# Altium PCB FAT42.PCBDOC
Units mm, origin at the board's own origin, x right, y up, seen from the top; angles counter-clockwise.
Board outline 152.4 x 101.6 mm, 4 copper layers (Top Layer, MidLayer1, MidLayer2, Bottom Layer); 76 components, 152 nets, 250 pads, 76 vias.
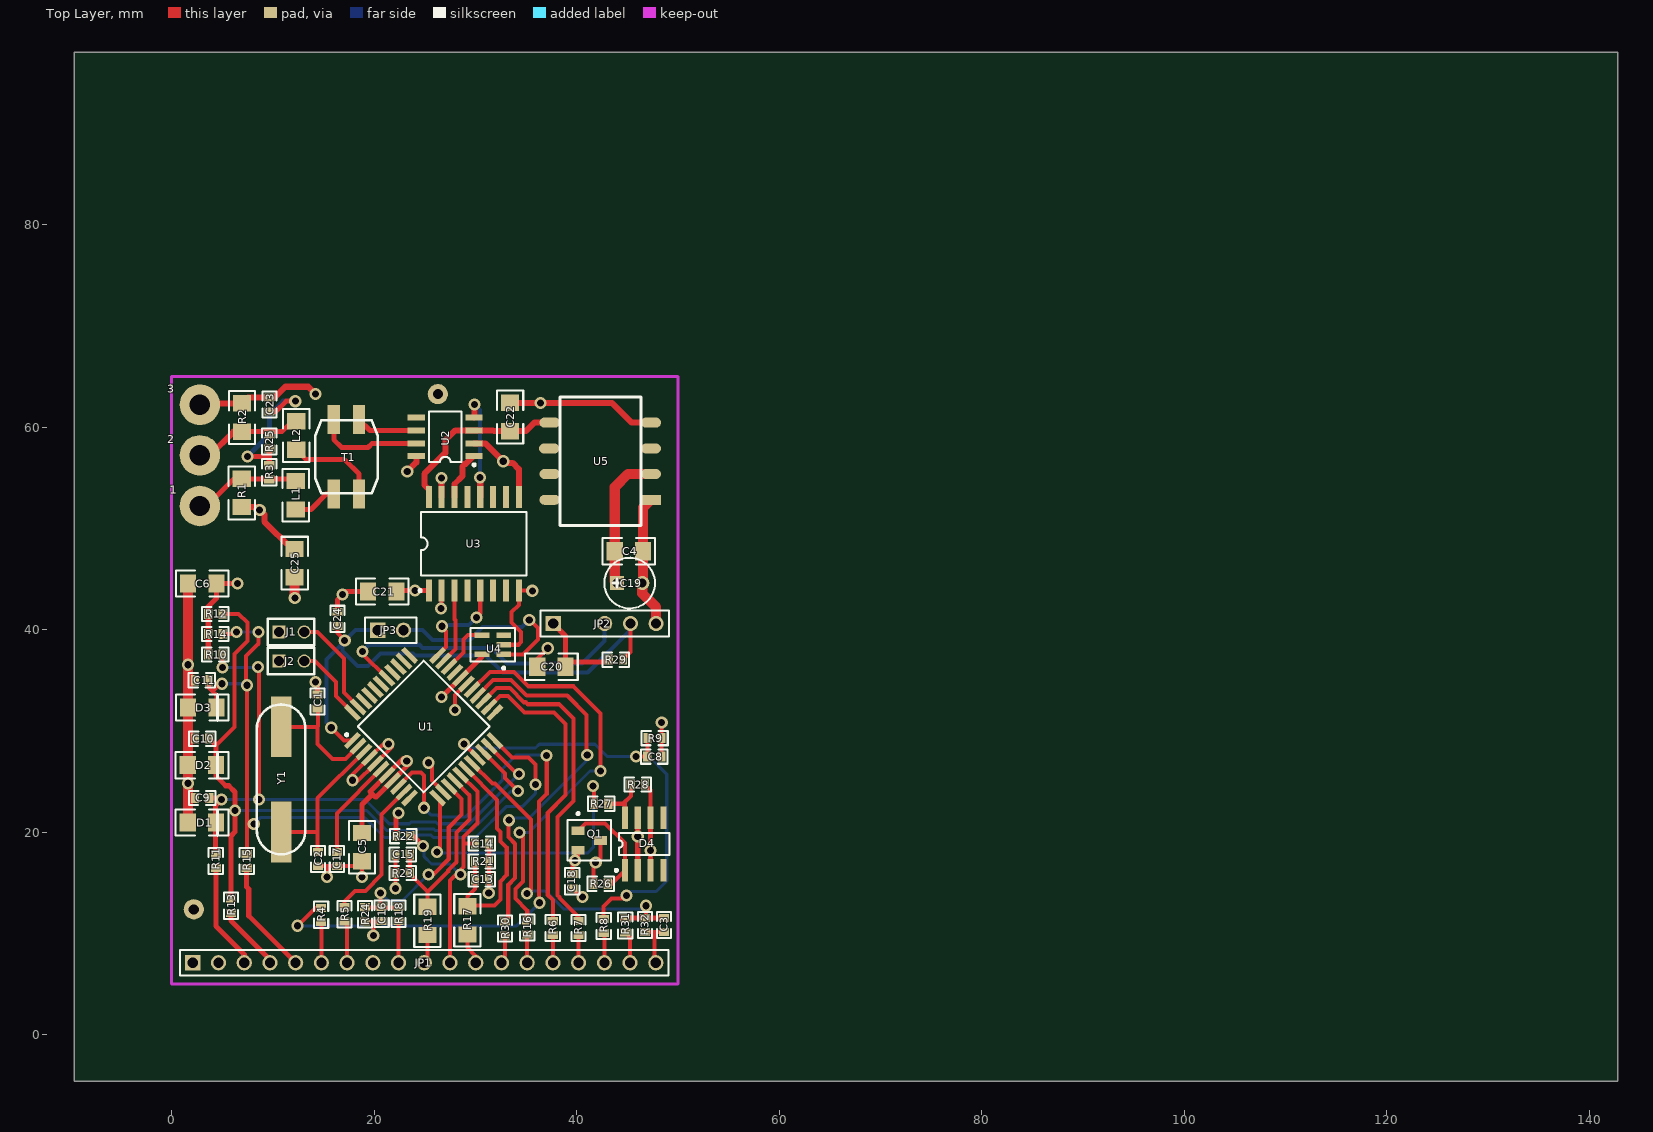
[diagram p0: Top Layer view]
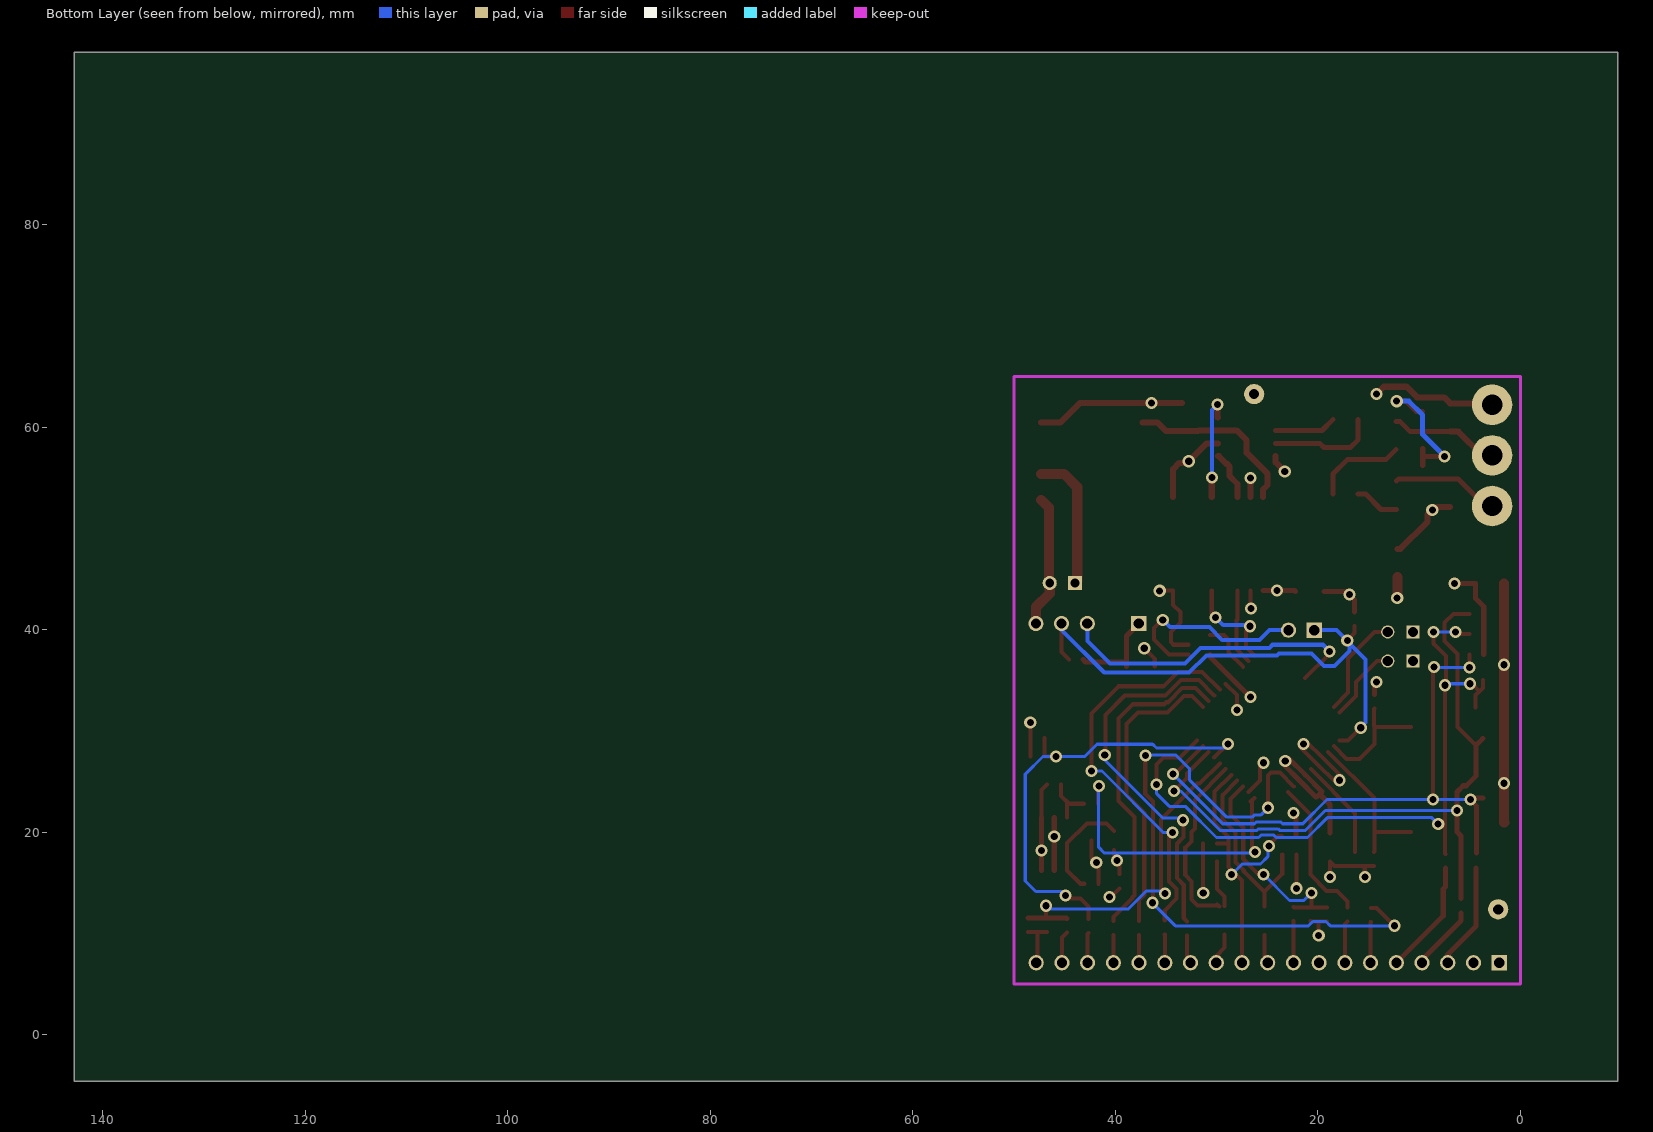
[diagram p1: Bottom Layer view, seen from below]
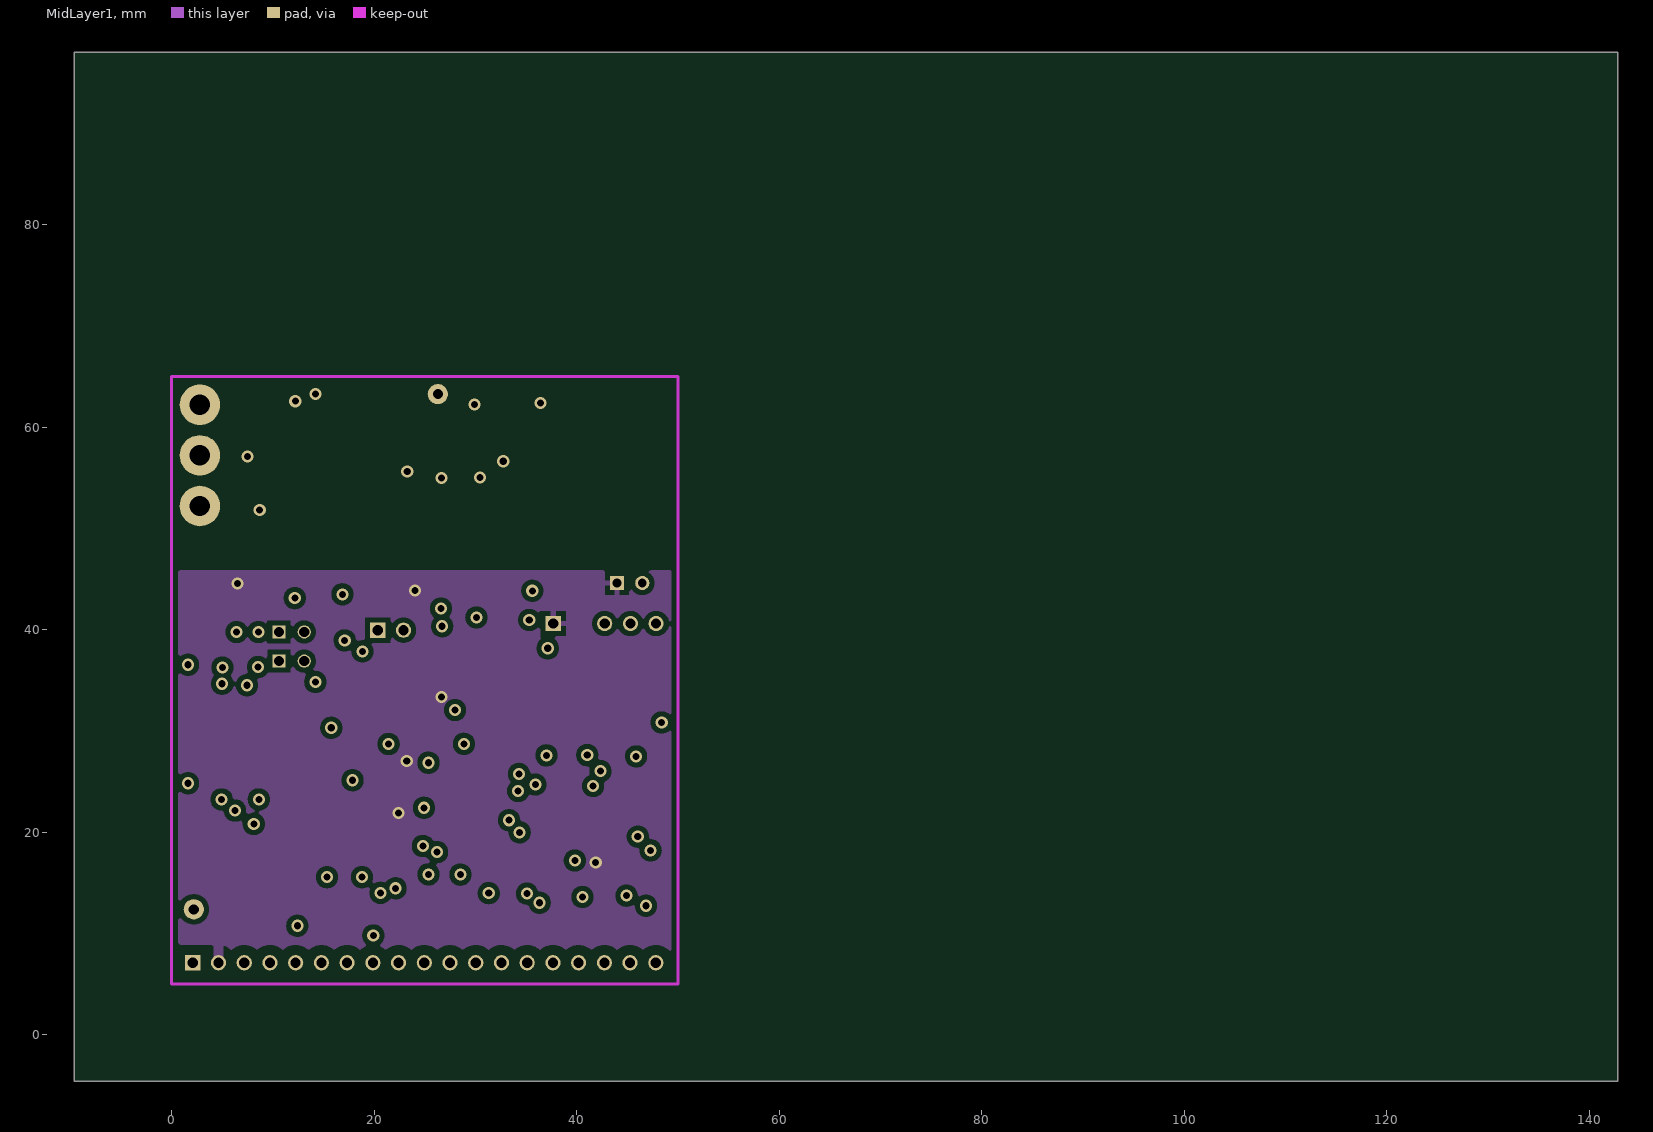
[diagram p2: MidLayer1]
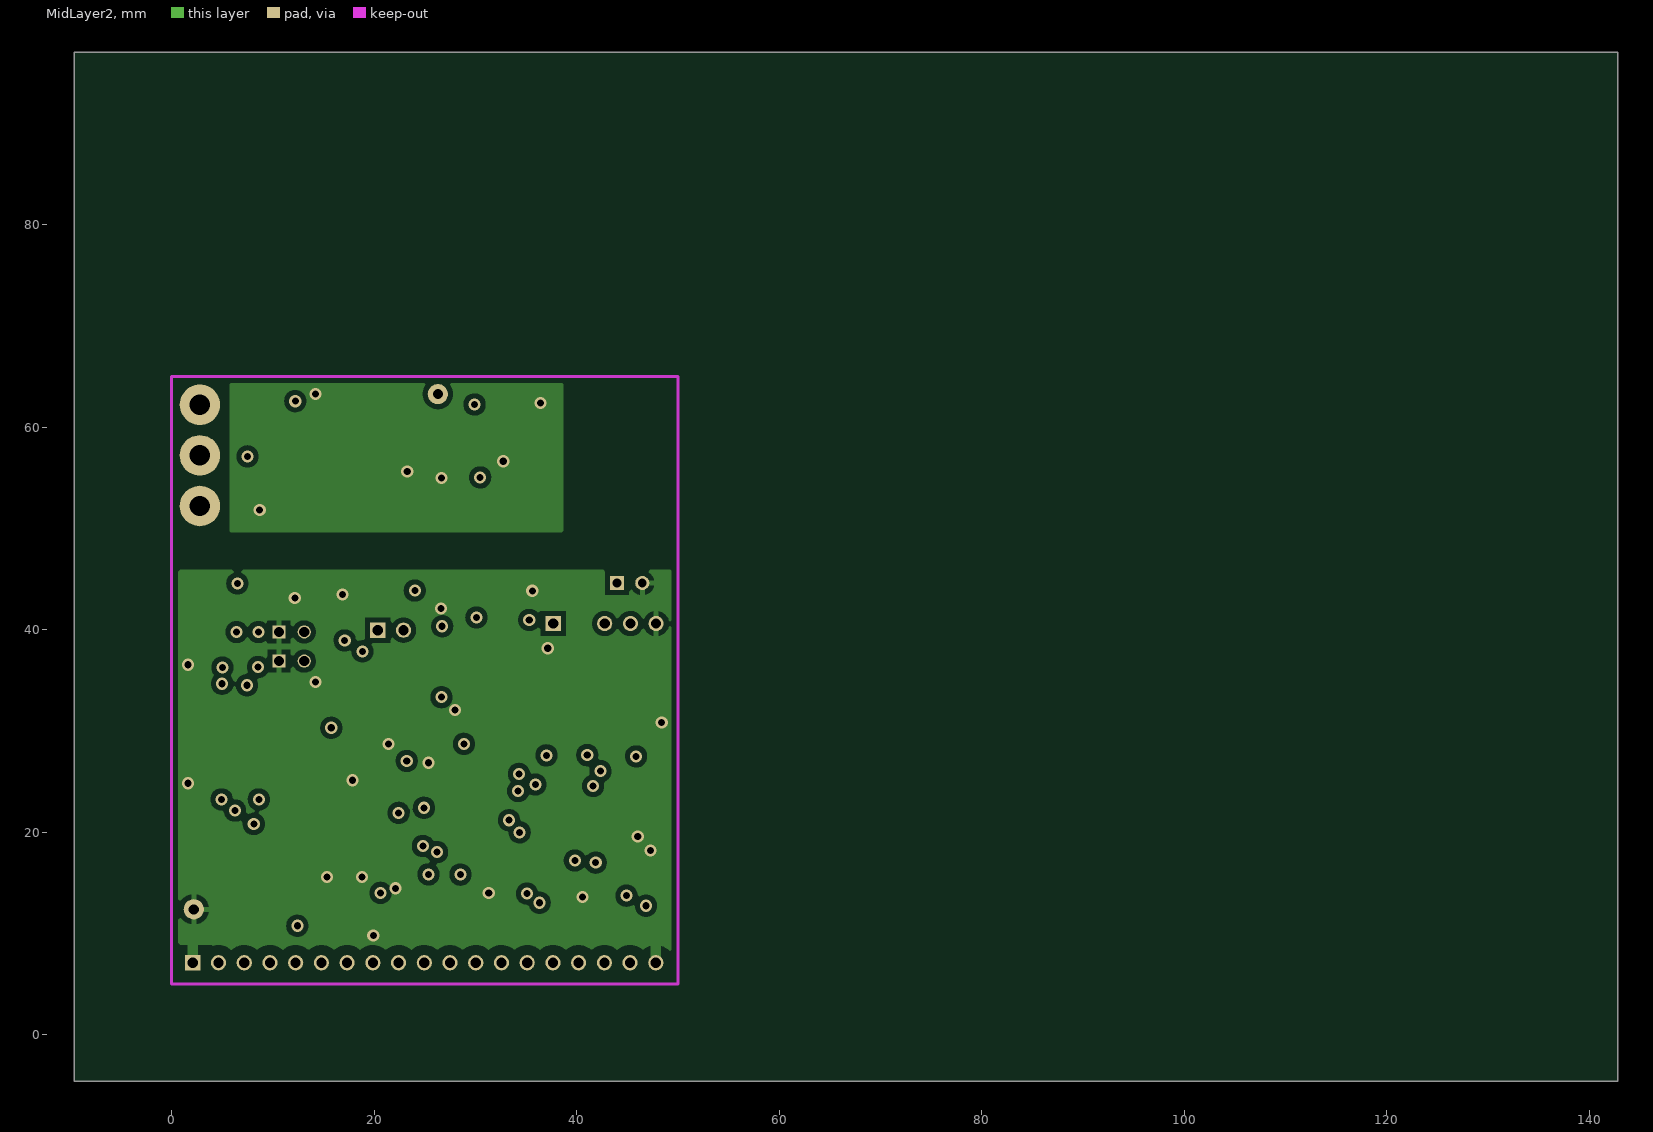
[diagram p3: MidLayer2]

## Layer stack, top to bottom
Top Layer: signal copper 0.0356
Dielectric: core 0.32, FR-4, Dk 4.8
MidLayer1: signal copper 0.0356
Dielectric: prepreg 0.32, FR-4, Dk 4.8
MidLayer2: signal copper 0.0356
Dielectric: core 0.32, FR-4, Dk 4.8
Bottom Layer: signal copper 0.0356

## Board outline
-9.6,-4.6 142.8,-4.6 142.8,97 -9.6,97

## Design rules (kind name [scope] priority, off if disabled: settings)
Clearance Clearance_1 [InPoly vs InComponent(JP1)] p1: gap=1
Clearance POLY [InPoly] p2: gap=0.5
Clearance mega [InComponent(U1)] p3: gap=0.2
Clearance [All] p4: gap=0.254
ComponentClearance [All] p1: gap=0.01 collisioncheckmode=0
PolygonConnect PolygonConnect_1 [InComponent(JP1)] p1: connectstyle=Relief reliefconductorwidth=1 reliefentries=4 polygonreliefangle="90 Angle"
PolygonConnect [All] p2: connectstyle=Relief reliefconductorwidth=0.5 reliefentries=4 polygonreliefangle="90 Angle"
RoutingLayers [All] p1: top layer=Horizontal mid layer 1="Not Used" mid layer 2="Not Used" bottom layer=Vertical
RoutingVias [All] p1: holewidth=0.7 width=1.2 viastyle="Through Hole" minholewidth=0.6 minwidth=1.1 maxholewidth=0.85 maxwidth=1.5
SolderMaskExpansion [All] p1: expansion=0.102
TestPointUsage [All] p1: valid=0 allowmultiple=FALSE
Testpoint [All] p1: side=15 testpointundercomponent=TRUE minsize=1.016 maxsize=2.54 preferedsize=1.524 minholesize=0 maxholesize=1.016 preferedholesize=0.813 testpointgrid=0.025 style=1023 order=-539222988
Width [All] p1: maxlimit=2 minlimit=0.254 preferedwidth=0.254 toplayer_prefwidth=0.6 midlayer1_prefwidth=0.5 midlayer2_prefwidth=0.5 bottomlayer_prefwidth=0.3 minimp=50.000000 maximp=50.000000 favimp=50.000000
16 further rules are at their usual default settings.

## Components (designator, comment, footprint, x,y, rotation, side; value= is the part's Value field where it differs from the comment)
1 "" PIN2R#1 2.875,51.85 r0 top (schematic designator ?)
2 "" PIN2R#2 2.875,57.05 r0 top (schematic designator ?)
3 "" PIN2R#3 2.7,61.925 r0 top (schematic designator ?)
C1 "10pF" _0603 14.425,32.9 r270 top (schematic designator C?)
C2 "10pF" _0603 14.475,17.35 r90 top (schematic designator C?)
C3 "1.0" _0603 48.625,10.825 r90 top (schematic designator C?)
C4 "22.0" _1206 45.15,47.725 r180 top (schematic designator C?)
C5 "22.0" _1206 18.8,18.525 r90 top
C6 "1.0" _1206 3.05,44.55 r0 top
C8 "1.0" _0603 47.675,27.45 r180 top (schematic designator C?)
C9 "1.0" _0603 3.025,23.375 r0 top
C10 "1.0" _0603 3.025,29.225 r0 top
C11 "1.0" _0603 3,35 r0 top
C13 "1.0" _0603 30.65,15.35 r180 top
C14 "1.0" _0603 30.65,18.875 r180 top
C15 "1.0" _0603 22.825,17.8 r0 top
C16 "1.0" _0603 20.75,11.925 r90 top
C17 "1.0" _0603 16.325,17.35 r90 top
C18 "1.0" _0603 39.575,15.15 r90 top
C19 "22.0x50" el3 43.975,44.6 r0 top
C20 "22.0" _1206 37.5,36.325 r180 top
C21 "22.0" _1206 20.8,43.75 r180 top
C22 "22.0" _1206 33.425,61 r90 top
C23 "100n" _0603 9.675,62.225 r90 top
C24 "1.0" _0603 16.375,41.05 r270 top
C25 "1n0 x 1000" _1206 12.15,46.575 r90 top (schematic designator C?)
D1 "C5v6" _1206d 3,20.935 r180 top
D2 "C5v6" _1206d 3,26.605 r180 top
D3 "C5v6" _1206d 3.025,32.3 r180 top
D4 "TL431ACD" SO-G8 46.675,18.825 r0 top
J1 "" jmp 10.6,39.775 r0 top
J2 "" jmp 10.6,36.9 r0 top
JP1 "PLSR19" HDR1X19 2.1,7.1 r0 top
JP2 "" HDR1X5_uart 37.7,40.6 r0 top
JP3 "PLS2" HDR1X2 20.375,39.925 r0 top
L1 "Inductor Iron" _1206 12.25,53.275 r90 top (schematic designator L?)
L2 "Inductor Iron" _1206 12.3,59.175 r90 top (schematic designator L?)
Q1 "BC847" SO-G3 41.25,19.175 r270 top
R1 "ST1206K14G" _1206 6.95,53.475 r270 top
R2 "ST1206K14G" _1206 6.95,60.95 r90 top
R3 "680R" _0603 9.65,55.525 r90 top
R4 "1K0" _0603 14.775,11.825 r90 top (schematic designator R31)
R5 "1K0" _0603 17.075,11.875 r90 top (schematic designator R30)
R6 "100R" _0603 37.65,10.525 r270 top (schematic designator R?)
R7 "100R" _0603 40.175,10.525 r270 top (schematic designator R?)
R8 "1R0" _0603 42.675,10.725 r270 top (schematic designator R?)
R9 "2K0" _0603 47.7,29.275 r180 top (schematic designator R?)
R10 "1K0" _0603 4.325,37.525 r0 top
R11 "100R" _0603 4.375,17.15 r270 top
R12 "1K0" _0603 4.325,41.55 r0 top
R13 "100R" _0603 5.875,12.725 r270 top
R14 "1K0" _0603 4.325,39.575 r0 top
R15 "100R" _0603 7.425,17.15 r270 top
R16 "100R" _0603 35.125,10.575 r270 top
R17 "33K" _1206 29.225,11.275 r270 top
R18 "100R" _0603 22.425,11.925 r270 top
R19 "33K" _1206 25.275,11.225 r270 top
R21 "1K5" _0603 30.65,17.1 r180 top
R22 "2K0" _0603 22.875,19.6 r180 top
R23 "1K5" _0603 22.825,15.95 r0 top
R24 "100M" _0603 19.1,11.875 r90 top
R25 "680R" _0603 9.65,58.575 r270 top
R26 "1K0" _0603 42.375,14.9 r0 top
R27 "1K0" _0603 42.425,22.8 r180 top
R28 "1K8" _0603 46.05,24.7 r180 top
R29 "10K" _0603 43.875,37.025 r0 top
R30 "100R" _0603 32.925,10.475 r270 top
R31 "33K" _0603 44.8,10.775 r270 top
R32 "2K0" _0603 46.75,10.825 r90 top
T1 "Trans Cupl" B82790 17.275,57.05 r90 top
U1 "STM8S208S6" QFP10X10-G44/G10N 24.9,30.425 r45 top
U2 "TJA1050" SO-G8/D5 27.025,59.025 r90 top
U3 "ISO7231" SO-G16/D10.4 29.85,48.475 r0 top
U4 "TPS3823-50" SO-G5/P.95 31.725,38.5 r90 top
U5 "SBT01L-05" SBT01L 47.35,52.8 r90 top
Y1 "10MHz" hc49/us 10.825,25.2 r270 top

## Footprints (in the part's own frame and the unit in brackets; to place one, negate y for a bottom-side part, rotate by r counter-clockwise, add the part's x,y. Pads: shape width x height; smd on the part's side, far side on the other; paste and mask are expansions set on the pad)
_0603 [mm]
  rect 0.8x1 smd: 1(-0.7,0) 2(0.7,0)
  silkscreen extent -1.3,-0.7 1.3,0.7
_1206 [mm]
  rect 1.6x1.8 smd: 1(-1.412,-0.007) 2(1.388,-0.007)
  silkscreen extent -2.61,-1.31 2.59,1.29
_1206d [mm]
  rect 1.6x1.8 smd: 1(1.395,-0.009) 2(-1.405,-0.009)
  silkscreen extent -2.6,-1.31 2.6,1.29
B82790 [mm]
  rect 2.85x1.2 smd: 1(3.675,-1.25) 2(-3.675,-1.25) 3(3.675,1.25) 4(-3.675,1.25)
  silkscreen extent -3.6,-3.1 3.6,3.1
el3 [mm]
  rect 1.4x1.4 hole 0.85: 1(0.011,-0.008)
  round 1.4 hole 0.85: 2(2.511,-0.008)
  silkscreen extent -1.23,-2.51 3.76,2.49
hc49/us [mm]
  rect 6x2 smd: 1(-5.2,0) 2(5.2,0)
  silkscreen extent -7.4,-2.4 7.4,2.4
HDR1X2 [mm]
  rect 1.5x1.5 hole 1: 1(-0.005,0.012)
  round 1.5 hole 1: 2(2.535,0.012)
  silkscreen extent -1.28,-1.26 3.8,1.28
HDR1X5_uart [mm]
  rect 1.5x1.5 hole 1: 1(-0.008,-0.009)
  round 1.5 hole 1: 3(5.072,-0.009) 4(7.612,-0.009) 5(10.152,-0.009)
  silkscreen extent -1.28,-1.28 11.42,1.26
HDR1X19 [mm]
  rect 1.5x1.5 hole 1: 1(0,0)
  round 1.5 hole 1: 2(2.54,0) 3(5.08,0) 4(7.62,0) 5(10.16,0) 6(12.7,0) 7(15.24,0) 8(17.78,0) 9(20.32,0) 10(22.86,0) 11(25.4,0) 12(27.94,0) 13(30.48,0) 14(33.02,0) 15(35.56,0) 16(38.1,0) 17(40.64,0) 18(43.18,0) 19(45.72,0)
  silkscreen extent -1.27,-1.27 46.99,1.27
jmp [mm]
  rect 1.3x1.3 hole 1: 1(0.008,-0.012)
  round 1.3 hole 1: 2(2.508,-0.012)
  silkscreen extent -1.09,-1.31 3.51,1.29
PIN2R#1 [mm]
  round 4 hole 2: 1(-0.075,0.35)
PIN2R#2 [mm]
  round 4 hole 2: 1(-0.075,0.15)
PIN2R#3 [mm]
  round 4 hole 2: 1(0.1,0.275)
QFP10X10-G44/G10N [mm]
  rect 1.9x0.5 smd: 1(-5.95,4) 2(-5.95,3.2) 3(-5.95,2.4) 4(-5.95,1.6) 5(-5.95,0.8) 6(-5.95,0) 7(-5.95,-0.8) 8(-5.95,-1.6) 9(-5.95,-2.4) 10(-5.95,-3.2) 11(-5.95,-4) 23(5.95,-4) 24(5.95,-3.2) 25(5.95,-2.4) 26(5.95,-1.6) 27(5.95,-0.8) 28(5.95,0) 29(5.95,0.8) 30(5.95,1.6) 31(5.95,2.4) 32(5.95,3.2) 33(5.95,4)
  rect 0.5x1.9 smd: 12(-4,-5.95) 13(-3.2,-5.95) 14(-2.4,-5.95) 15(-1.6,-5.95) 16(-0.8,-5.95) 17(0,-5.95) 18(0.8,-5.95) 19(1.6,-5.95) 20(2.4,-5.95) 21(3.2,-5.95) 22(4,-5.95) 34(4,5.95) 35(3.2,5.95) 36(2.4,5.95) 37(1.6,5.95) 38(0.8,5.95) 39(0,5.95) 40(-0.8,5.95) 41(-1.6,5.95) 42(-2.4,5.95) 43(-3.2,5.95) 44(-4,5.95)
  silkscreen extent -6.07,-4.6 4.6,4.92
SBT01L [mm]
  rect 1x2 smd: 1(0.007,0.007)
  oval 1x2 smd: 2(2.557,0.007) 3(5.082,0.007) 4(7.632,0.007) 5(7.632,10.007) 6(5.082,10.057) 7(2.557,10.007) 8(0.007,10.007)
  silkscreen extent -2.54,0.98 10.16,9.01
SO-G3 [mm]
  rect 0.85x1.3 smd: 1(-0.948,-1.102) 2(0.952,-1.102) 3(0.002,1.098)
  silkscreen extent -2.77,-2.15 2,2.15
SO-G5/P.95 [mm]
  rect 0.55x1.45 smd: 1(-0.95,-1.075) 2(0,-1.075) 3(0.95,-1.075) 4(0.95,1.075) 5(-0.95,1.075)
  silkscreen extent -2.42,-2.2 1.65,2.2
SO-G8 [mm]
  rect 0.6x2.2 smd: 1(-1.905,-2.6) 2(-0.635,-2.6) 3(0.635,-2.6) 4(1.905,-2.6) 5(1.905,2.6) 6(0.635,2.6) 7(-0.635,2.6) 8(-1.905,2.6)
  silkscreen extent -2.88,-2.72 2.5,1.1
SO-G8/D5 [mm]
  rect 0.6x1.7 smd: 1(-1.905,-2.85) 2(-0.635,-2.85) 3(0.635,-2.85) 4(1.905,-2.85) 5(1.905,2.85) 6(0.635,2.85) 7(-0.635,2.85) 8(-1.905,2.85)
  silkscreen extent -2.88,-2.97 2.5,1.6
SO-G16/D10.4 [mm]
  rect 0.6x2.15 smd: 1(-4.445,-4.625) 2(-3.175,-4.625) 3(-1.905,-4.625) 4(-0.635,-4.625) 5(0.635,-4.625) 6(1.905,-4.625) 7(3.175,-4.625) 8(4.445,-4.625) 9(4.445,4.625) 10(3.175,4.625) 11(1.905,4.625) 12(0.635,4.625) 13(-0.635,4.625) 14(-1.905,4.625) 15(-3.175,4.625) 16(-4.445,4.625)
  silkscreen extent -5.42,-4.75 5.2,3.15

## Part data
1 2 3: library part Socket_Ring, "Socket"
C1 C2 C3 C4 C5 C6 C8 C9 C10 C11 C13 C14 C15 C16 C17 C18 C20 C21 C22 C23 C24 C25: library part "Cap Semi", "Capacitor (Semiconductor SIM Model)"
C19: library part "Cap Pol1", "Polarized Capacitor (Radial)"
D1 D2 D3: library part Zener, "Default Diode"
D4: "Programmable Precision Reference"
J1 J2: library part JMP, "Switch"
JP1: library part "Header 30", "Header, 30-Pin"
JP2: library part SWIM_CONN
JP3: library part "Header 2", "Header, 2-Pin"
L1 L2: "Magnetic-Core Inductor"
Q1: library part BC847ALT1, "General Purpose Transistor NPN Silicon"
R1 R2: library part "Res Varistor", "Varistor (Voltage-Sensitive Resistor)"
R3 R4 R5 R6 R7 R8 R9 R10 R11 R12 R13 R14 R15 R16 R17 R18 R19 R21 R22 R23 R24 R25 R26 R27 R28 R29 R30 R31 R32: library part Res2, "Resistor"
T1: "Transformer (Coupled Inductor Model)"
U4: library part TPS3823, "Reset IC"
U5: library part SBT01L
Y1: library part XTAL, "Crystal Oscillator"

## Free pads (board coordinates)
  round 2 hole 1: 0(2.2,12.375) 0(26.3,63.25)

## Via types
v1: diameter 1.2, hole 0.7, Top Layer to Bottom Layer, 76 vias

## Nets (pads, with @x,y where several pads share a name; then routed paths per layer and width w, separated by ;. In a path a pad name is that pad's centre, name@x,y a point inside that pad or via, vN(x,y) a via of type N, cw(c..) or ccw(c..) an arc to the next point about the centre after c; other vN are vias at no path point)
+5V: C4.2 C5.2 C6.2 C19.1 C20.1 C21.1 JP1.2 JP2.1 Q1.3 R10.1 R12.1 R14.1 R22.2 R26.1 R29.1 U1.7 U1.8 U1.29 U3.1 U4.5 U5.2 | length 63.2
  Top Layer w0.4: R26.1 41.675,16.775 42.348,17.448 Q1.3
  Top Layer w0.5: R10.1 3.625,42.275 4.438,43.088 C6.2 4.444,44.55 v1@6.525,44.55 ; C5.2 18.807,22.716 19.845,23.755 ; R22.2 22.175,21.625 v1@22.225,21.675 ; C21.1 22.212,43.762 22.3,43.85 U3.1 ; v1@23.15,26.95 v1(23.225,27.025) ; v1(26.65,33.325) 26.669,33.325 30.65,37.306 U4.5 ; JP2.1 38.912,39.37 C20.1 ; C20.1@38.912,36.8 42.95,36.8 R29.1 ; 19.6,23.994 U1.7 22.85,27.244 23.406,26.687 23.425,26.687 U1.8 20.213,23.475 20.125,23.475 19.606,23.994 19.6,23.994
  Top Layer w1: C19.1 43.762,44.816 43.762,54.062 45.057,55.357 U5.2
  other v1: 41.884,16.984 22.425,21.9 24.025,43.85 6.5,44.55
C0: 
C1: 
C2: 
C3: 
C4: 
C5: 
C7: 
C8: 
CS: 
D2: 
D3: 
D4: 
D4: 
D4: 
D5: 
D6: 
D7: 
GND: C1.1 C2.1 C3.1 C4.1 C5.1 C6.1 C8.1 C9.1 C10.1 C11.1 C13.1 C14.1 C15.1 C16.1 C17.1 C18.1 C19.2 C20.2 C21.2 C24.1 C25.1 D1.1 D2.1 D3.1 D4.2 D4.3 D4.6 D4.7 J1.1 J2.1 JP1.1 JP1.19 JP2.5 pad.0@2.2,12.375 R9.1 R21.1 R23.1 R24.1 R28.1 R32.1 U1.4 U1.5 U1.13 U1.28 U3.2 U3.8 U4.2 U5.1 | length 118.1
  Top Layer w0.4: C2.1 18.344,16.65 C5.1 18.807,15.557 v1(18.8,15.55) ; v1(15.35,15.55) 15.375,15.575 15.375,16.65 ; R24.1 20.7,11.175 C16.1 ; v1(19.925,9.8) 19.925,11.175 ; v1@21.55,28.588 v1@21.562,28.588 ; v1(22.125,14.45) C15.1 ; v1(25.375,26.85) 25.7,26.525 25.7,25.1 U1.13 ; v1(26.6,42.075) 26.675,42.15 U3.2 ; v1(28,32.05) 28,33.525 U1.28 ; C14.1 31.35,14.475 v1@31.675,14.15 ; U4.2 34.25,38.5 34.525,38.775 34.525,39.75 33.575,40.7 33.575,41.725 34.295,42.445 U3.8 35.575,43.85 35.6,43.825 v1(35.625,43.825) ; C20.2 36.112,37.112 v1(37.15,38.15) ; C18.1 40.625,13.4 v1@40.675,13.4 ; R32.1 C3.1 ; R28.1 47.31,24.14 D4.6 ; 47.7,10.125 47.7,7.22 JP1.19 ; C8.1 48.375,29.25 R9.1 v1(48.4,30.825) ; v1@17.687,25.313 18.125,24.875 18.219,24.875 U1.5 20.133,26.783 21.75,28.4 21.738,28.4 v1(21.44,28.698) 21.44,28.71 21.2,28.95 21.162,28.95 U1.4 17.687,25.475 v1@17.687,25.313
  Top Layer w0.5: v1(14.2,34.825) 14.425,34.6 C1.1 ; C24.1 16.375,42.925 17.207,43.757 C21.2 ; D4.2 D4.7 ; D4.3 D4.6
  Top Layer w1: D1.1 1.638,20.977 C6.1 ; C25.1 12.157,43.118 v1(12.175,43.1) ; U5.1 46.562,52.027 C4.1 46.562,44.668 C19.2 46.486,43.564 47.852,42.198 JP2.5
  MidLayer1 w0.5: v1(35.625,43.825) v1@35.65,43.8 ; v1@40.65,13.4 v1@40.675,13.4
  other v1: 40.575,13.6 31.325,13.975 47.31,18.2 46.04,19.55 1.638,24.825 17.879,25.121 1.638,36.525 16.875,43.475
ID0: 
ID0: JP1.3 R11.2 | length 10.5
  Top Layer w0.5: R11.2 4.375,10.725 7.18,7.92 JP1.3
ID1: JP1.4 R13.2 | length 6.5
  Top Layer w0.5: R13.2 5.875,11.25 9.72,7.405 JP1.4
ID2: JP1.5 R15.2 | length 11.4
  Top Layer w0.5: R15.2 7.425,14.575 7.625,14.375 7.625,11.735 JP1.5
IN0: JP1.17 R8.2 | length 3
  Top Layer w0.4: R8.2 42.74,9.96 JP1.17
IN1: 
IN1: 
IN1: 
IN1: 
IN2: JP1.12 R17.2 | length 3.1
  Top Layer w0.4: R17.2 29.218,8.607 30.04,7.785 JP1.12
IN3: C14.2 JP1.11 R22.1 U1.16 | length 28.9
  Top Layer w0.4: R22.1 23.95,19.6 v1@24.95,18.6 ; JP1.11 27.5,15.2 28.85,16.55 28.85,19.525 30.2,20.875 30.2,23.994 U1.16 ; v1@28.3,16 28.5,15.8 v1(28.525,15.8) ; 28.85,18.75 28.975,18.875 C14.2
  Bottom Layer w0.3: v1@24.95,18.6 24.95,17.575 25.675,16.85 27.475,16.85 v1(28.525,15.8)
  other v1: 24.825,18.625
IN4: JP1.10 R19.2 | length 2.9
  Top Layer w0.4: JP1.10 25.268,7.408 R19.2
IN5: JP1.9 R18.2 | length 4.1
  Top Layer w0.4: JP1.9 22.42,11.22 R18.2
IN6: JP1.18 R31.2 | length 3.2
  Top Layer w0.4: R31.2 45.28,9.595 JP1.18
LED0: JP1.6 R4.1 | length 4
  Top Layer w0.4: R4.1 14.8,11.1 JP1.6
LED1: JP1.7 R5.1 | length 4.2
  Top Layer w0.4: R5.1 17.34,10.91 JP1.7
MISO: 
MOSI: 
Net1_1: 1.1 L1.2 R1.1 R3.1 | length 10.7
  Top Layer w0.5: 1.1 3.475,52.2 6.162,54.887 R1.1 12.032,54.887 L1.2
Net2_1: 2.1 L2.2 R2.1 R25.1 | length 11.3
  Top Layer w0.5: R2.1@6.588,59.538 10.888,59.538 11.913,60.563 L2.2
  Top Layer w0.6: 2.1 3.8,57.2 6.138,59.538 R2.1
Net3_1: 3.1 C22.2 C23.2 C25.2 R1.2 R2.2 U2.2 U2.8 U3.9 U3.15 U5.4 | length 46.5
  Top Layer w0.6: 3.1 2.938,62.338 R2.2 7.544,62.925 C23.2 10.2,62.925 11.25,63.975 13.5,63.975 v1(14.225,63.25) ; R1.2 8.438,52.087 9.175,51.35 9.175,50.65 11.862,47.963 C25.2 ; v1(23.275,55.6) 24.175,56.5 U2.8 ; U3.15 v1(26.675,54.975) ; U2.2 30.985,58.39 32.925,56.45 33.675,56.45 34.295,55.83 U3.9 ; C22.2 43.487,62.388 45.443,60.432 U5.4
  other v1: 8.705,51.82 32.758,56.617 36.45,62.388
NetC1_2: 
NetC2_2: 
NetC17_2: C17.2 U1.6 | length 10
  Top Layer w0.4: C17.2 16.325,21.85 U1.6
NetC21_2: 
NetC22_1: C22.1 U2.3 U3.16 U5.5 | length 17.7
  Top Layer w0.6: U3.16 25.405,53.845 24.975,54.275 24.975,55.375 27.05,57.45 27.05,58.675 28.035,59.66 31.753,59.66 31.825,59.588 34.988,59.588 35.832,60.432 U5.5
NetC23_1: C23.1 R3.2 R25.2 | length 14.9
  Top Layer w0.5: v1(7.5,57.1) 9.65,57.1 ; R3.2 R25.2 ; C23.1 10.3,61.525 11.325,62.55 v1(12.225,62.55)
  Bottom Layer w0.5: v1(7.5,57.1) 9.675,59.275 9.675,61.2 11.025,62.55 v1(12.225,62.55)
NetC25_2: 
NetC26_2: 
NetD1_2: 
NetD2_1: 
NetD2_2: 
NetD3_2: 
NetD4_1: D4.1 Q1.1 R26.2 | length 10.7
  Top Layer w0.4: Q1.1 40.874,20.85 42.825,20.85 44.77,18.905 D4.1 43.445,14.9 R26.2
NetD4_8: D4.8 R27.1 R28.2 | length 5.2
  Top Layer w0.4: R27.1 44.6,22.8 45.35,23.55 R28.2 ; D4.8 44.77,22.97
NetD14_2: 
NetJ1_2: J1.2 U1.43 | length 10.4
  Top Layer w0.4: J1.2 14.412,39.763 17.025,37.15 17.025,33.775 U1.43
NetJ2_2: J2.2 U1.44 | length 7.7
  Top Layer w0.4: J2.2 14.162,36.888 16.225,34.825 16.225,33.443 U1.44
NetJmp1_2: 
NetJmp2_2: 
NetJP1_5: 
NetJP1_6: 
NetJP1_7: 
NetJP1_8: 
NetJP1_13: 
NetJP1_13: 
NetJP1_13: 
NetJP1_13: JP1.13 R30.2 | length 2.8
  Top Layer w0.4: JP1.13 32.925,7.445 R30.2
NetJP1_14: JP1.14 R16.2 | length 2.8
  Top Layer w0.4: JP1.14 35.12,9.87 R16.2
NetJP1_15: 
NetJP1_15: 
NetJP1_15: JP1.15 R6.2 | length 2.7
  Top Layer w0.4: R6.2 37.65,7.11 JP1.15
NetJP1_16: 
NetJP1_16: 
NetJP1_16: JP1.16 R7.2 | length 2.7
  Top Layer w0.4: R7.2 40.2,9.8 JP1.16
NetJP1_17: 
NetJP1_17: 
NetJP1_25: 
NetJP1_27: 
NetJP1_28: 
NetJP3_2: JP3.2 U4.1 | length 19.9
  Top Layer w0.4: U4.1 34.7,37.55 36.175,39.025 36.175,40.175 35.4,40.95 v1(35.325,40.95)
  Bottom Layer w0.4: JP3.2 24.788,39.937 25.75,38.975 29.45,38.975 30.725,40.25 34.625,40.25 v1(35.325,40.95)
NetL1_1: L1.1 T1.4 | length 4.4
  Top Layer w0.5: L1.1 13.763,51.863 15.275,53.375 T1.4
NetL2_1: L2.1 T1.2 | length 9.2
  Top Layer w0.5: L2.1 13.294,56.775 17.1,56.775 18.525,55.35 T1.2
NetQ1_1: 
NetQ2_1: 
NetQ2_3: 
NetR14_1: 
NetR15_1: 
NetR24_1: 
NetR30_2: 
NetR31_2: 
NetR34_1: 
NetR35_1: 
NetR36_1: 
NetR41_2: 
NetT1_1: T1.1 U2.6 | length 6.1
  Top Layer w0.5: T1.1 19.59,59.66 U2.6
NetT1_3: T1.3 U2.7 | length 10.6
  Top Layer w0.5: T1.3 16.025,58.75 16.8,57.975 19.4,57.975 19.815,58.39 U2.7
NetU1_11: 
NetU1_30: 
NetU2_1: U2.1 U3.14 | length 4.9
  Top Layer w0.6: U3.14 27.945,54.37 28.725,55.15 28.725,56.1 29.025,56.4 ; 29.05,56.375 29.795,57.12 U2.1
NetU2_4: U2.4 U3.12 | length 10.7
  Top Layer w0.6: U2.4 29.925,60.98 v1(29.925,62.225) ; v1(30.475,55.025) 30.485,55.015 U3.12
  Bottom Layer w0.4: v1(29.925,62.225) 30.475,61.675 v1(30.475,55.025)
NetU3_4: 
NetU3_6: 
NetU3_7: 
PA1: C1.2 U1.2 Y1.1 | length 12.3
  Top Layer w0.4: Y1.1 14.4,30.4 ; C1.2 14.45,32.175 14.45,30.45 14.4,30.4 ; U1.2 17.175,27.225 15.875,27.225 14.4,28.7 14.4,30.4
PA2: C2.2 U1.3 Y1.2 | length 15.4
  Top Layer w0.4: Y1.2 14.4,20 14.425,20.025 ; C2.2 14.425,18.1 14.425,23.344 U1.3
PA4: R4.2 U1.9 | length 65.5
  Top Layer w0.4: v1(12.425,10.75) 14.2,12.525 R4.2 ; U1.9 23.744,25.875 24.65,25.875 24.925,25.6 v1(24.925,22.4) ; v1(36.35,13.025) 36.275,13.1 36.275,23 37.05,23.775 37.05,27.55 v1(37.025,27.575)
  Bottom Layer w0.3: v1(12.425,10.75) 18.775,10.75 19.2,11.175 20.5,11.175 20.925,10.75 34.075,10.75 v1(36.35,13.025) ; v1(24.925,22.4) 25.65,21.675 26.3,21.675 26.5,21.475 29,21.475 32.7,25.175 32.7,26.275 34.025,27.6 36.925,27.6 37.025,27.7 v1(37.025,27.575)
PA5: R5.2 U1.10 | length 14.4
  Top Layer w0.4: R5.2 17.075,13.15 18.125,14.2 19.15,14.2 20.75,15.8 20.75,21.749 U1.10
PB0: C9.2 D1.2 R10.2 R11.1 U1.21 | length 61.5
  Top Layer w0.4: v1(5.025,36.25) 5.025,36.55 R10.2 ; v1(8.55,36.3) 8.625,36.225 v1(8.625,23.225) ; U1.21 34.1,25.75 v1(34.3,25.75)
  Top Layer w0.5: C9.2 4.85,23.375 v1@5,23.225 ; R11.1@4.325,17.95 4.325,22.55 v1@5,23.225 ; v1(4.95,23.225) v1@5,23.225
  Bottom Layer w0.3: v1(4.95,23.225) 19.1,23.225 21.5,20.825 23.5,20.825 23.65,20.975 26.125,20.975 26.275,20.825 29.4,20.825 34.3,25.725 v1(34.3,25.75) ; v1(5.025,36.25) 8.5,36.25 v1(8.55,36.3)
PB1: C10.2 D2.2 R12.2 R13.1 U1.20 | length 69.2
  Top Layer w0.4: 4.405,28.545 6.225,30.366 6.225,37.575 6.871,38.221 7.5,38.85 7.5,40.675 6.625,41.55 R12.2 ; U1.20 32.925,25.794 32.925,25.35 v1(34.225,24.05)
  Top Layer w0.5: C10.2 4.405,28.545 4.405,25.52 5.35,24.575 5.65,24.575 6.275,23.95 6.275,20.025 5.875,19.625 R13.1
  Bottom Layer w0.3: v1(6.275,22.125) 19.275,22.125 21.225,20.175 23.775,20.175 23.925,20.325 25.875,20.325 26.025,20.175 29.675,20.175 33.55,24.05 v1(34.225,24.05)
PB2: C8.2 R8.1 R9.2 U1.19 | length 45.5
  Top Layer w0.4: v1(28.875,28.713) U1.19 ; R8.1 42.675,12.65 43.45,13.425 44.625,13.425 v1(44.925,13.725) ; v1(45.875,27.475) 46.95,27.475 C8.2 47,27.475 R9.2
  Bottom Layer w0.3: v1(28.875,28.713) 29.288,28.3 35.95,28.3 36.325,28.675 41.825,28.675 43.025,27.475 47.15,27.475 48.9,25.725 48.9,15.175 47.85,14.125 45.325,14.125 v1(44.925,13.725)
PB3: C3.2 R31.1 R32.2 U1.18 | length 33.4
  Top Layer w0.4: U1.18 31.675,24.781 31.944,24.781 35.475,21.25 35.475,14.275 35.125,13.925 v1(35.1,13.925) ; R32.2 46.85,11.625 v1(46.85,12.725)
  Top Layer w0.5: R31.1 44.85,11.525 C3.2
  Bottom Layer w0.3: v1(35.1,13.925) 35.35,14.175 36.95,14.175 38.7,12.425 46.55,12.425 v1(46.85,12.725)
PB4: C13.2 R17.1 R21.2 U1.17 | length 22.7
  Top Layer w0.4: U1.17 32.15,23.175 32.15,20.375 32.5,20.025 32.5,19.075 33.1,18.475 33.1,15.75 32.475,15.125 32.475,13.35 31.871,12.746 R17.1@29.827,12.746 ; R17.1 29.218,13.643 29.95,14.375 R21.2 ; R17.1@29.743,12.662 R17.1@29.827,12.746 ; R17.1@29.95,12.869 R17.1@29.827,12.746
PB6: C15.2 R19.1 R23.2 U1.15 | length 19.2
  Top Layer w0.4: C15.2 23.525,15.875 25.268,14.132 R19.1 ; 25.268,14.068 26.772,15.572 27.325,16.125 27.325,16.2 28.15,17.025 28.15,19.95 29.425,21.225 29.425,23.637 U1.15
PB7: C16.2 R18.1 R24.2 U1.14 | length 21.7
  Top Layer w0.4: R24.2 22.375,12.575 R18.1 ; v1(20.65,14) 20.65,12.725 C16.2 ; v1(25.375,15.825) 25.875,15.825 27.375,17.325 27.375,20.475 28.65,21.75 28.65,23.281 U1.14
  Bottom Layer w0.3: v1(20.65,14) 21.4,13.25 22.8,13.25 v1(25.375,15.825)
PC1: R6.1 U1.24 | length 29.5
  Top Layer w0.4: U1.24 32.451,33.45 33.225,33.45 34.875,31.8 37.775,31.8 38.9,30.675 38.9,23.65 37.15,21.9 37.15,13.8 37.65,13.3 R6.1
PC2: R7.1 U1.25 | length 32.2
  Top Layer w0.4: U1.25 32.094,34.225 33.4,34.225 34.804,32.821 34.979,32.821 35.175,32.625 38.275,32.625 39.7,31.2 39.7,23.075 38.125,21.5 38.125,13.75 38.304,13.571 38.304,13.496 40.175,11.625 R7.1
PC3: R30.1 U1.26 | length 38
  Top Layer w0.4: U1.26 31.763,35.025 33.525,35.025 35.075,33.475 39.075,33.475 40.975,31.575 40.975,27.675 v1(41.05,27.6) ; R30.1 33.25,11.5 33.25,14.8 33.925,15.475 33.925,18.85 33.275,19.5 v1@33.275,20.9
  Bottom Layer w0.3: v1@33.275,20.9 33.75,21.375 35.3,21.375 41.05,27.125 v1(41.05,27.6)
  other v1: 33.325,21.175
PC5: R16.1 U1.27 | length 40.9
  Top Layer w0.4: U1.27 31.431,35.825 33.825,35.825 35.25,34.4 39.675,34.4 42.35,31.725 v1(42.35,26.025) ; v1(34.375,19.975) 34.7,19.65 34.7,15.125 33.975,14.4 33.975,13.425 35.125,12.275 R16.1
  Bottom Layer w0.3: v1(34.375,19.975) 34.4,19.95 35.25,19.95 41.325,26.025 v1(42.35,26.025)
PC7: U1.31 U4.4 | length 5.3
  Top Layer w0.4: U1.31 28.825,37.744 28.825,39 29.275,39.45 U4.4
PD1: JP2.3 U1.38 | length 31.2
  Top Layer w0.4: v1(18.85,37.85) 18.85,37.606 U1.38
  Bottom Layer w0.4: v1(18.85,37.85) 19.5,38.5 24.475,38.5 24.8,38.175 31.6,38.175 33.125,36.65 40.55,36.65 42.772,38.872 JP2.3
PE6: C11.2 D3.2 R14.2 R15.1 U1.22 | length 72.2
  Top Layer w0.4: C11.2 3.7,34.25 4.051,33.899 ; D3.2 4.43,33.52 4.051,33.899 ; v1(5,34.65) 4.803,34.65 4.051,33.899 ; R14.2 6.25,39.575 v1(6.425,39.75) ; R15.1 7.45,17.875 v1(7.45,34.5) 7.35,34.6 7.35,37.375 8.575,38.6 v1(8.575,39.75) ; 7.45,20.825 8.1,20.825 v1(8.125,20.8) ; U1.22 33.632,27.35 35.25,27.35 35.925,26.675 v1(35.925,24.7)
  Bottom Layer w0.3: v1(5,34.65) 7.3,34.65 v1(7.45,34.5) ; v1(6.425,39.75) v1(8.575,39.75) ; v1(8.125,20.8) 8.75,21.425 19.075,21.425 21.025,19.475 24.125,19.475 24.35,19.7 25.625,19.7 25.85,19.475 30.025,19.475 33.1,22.55 34.675,22.55 35.925,23.8 v1(35.925,24.7)
PG0: U1.32 U3.3 | length 7.5
  Top Layer w0.4: U1.32 28.025,38.075 28.025,40.925 27.945,41.005 U3.3
PG1: U1.33 U3.5 | length 9.7
  Top Layer w0.4: U1.33 27.1,38.282 27.1,39.85 27.075,39.85 v1@26.775,40.15 ; v1(30.1,41.2) 30.485,41.585 U3.5
  Bottom Layer w0.4: v1@26.775,40.15 27.075,40.45 29.35,40.45 v1(30.1,41.2)
  other v1: 26.725,40.325
PWMI: 
PWMU: 
PWMU: 
PWMU: 
RES: 
RST: C24.2 JP2.4 JP3.1 R29.2 U1.1 | length 54.9
  Top Layer w0.4: v1(15.775,30.3) 17.029,29.046 U1.1 ; C24.2 16.375,39.65 v1(17.1,38.925) ; R29.2 45.312,37.762 JP2.4
  Bottom Layer w0.4: v1(15.775,30.3) 15.775,30.35 15.3,30.825 15.3,37.05 18.187,39.937 JP3.1 ; v1@16.869,38.619 16.869,37.881 18.35,36.4 19.4,36.4 20.65,37.65 23.85,37.65 24.05,37.45 31.025,37.45 32.725,35.75 41.1,35.75 45.312,39.962 JP2.4
RX: 
RX: 
RX: 
RX: 
RX: 
RX: 
RXD: 
RXD: 
SCK: 
TX: 
TX: 
TX: 
TX: 
TX: 
TX: 
TX: 
TX: 
TX: 
TX: 
TX: 
TX: 
TXS: 
UREF: C18.2 Q1.2 R27.2 U1.12 | length 33.4
  Top Layer w0.4: v1@26.1,17.925 26.125,17.925 26.525,18.325 26.525,23.143 U1.12 U1.12@26.65,23.018 ; C18.2 39.575,16.9 v1@39.85,17.175 ; v1(39.825,17.2) 39.85,17.175 40.148,17.473 Q1.2 ; v1(41.625,24.55) 41.725,24.45 R27.2
  Bottom Layer w0.3: v1@26.125,17.925 v1@26.75,17.925 ; v1@26.65,17.925 41.075,17.925 41.65,18.5 41.65,24.525 v1(41.625,24.55) ; v1(39.825,17.2) 39.825,17.8 39.95,17.925
  other v1: 26.225,18.025
pads on no net: D4.4 D4.5 JP1.8 U1.11 U1.23 U1.30 U1.34 U1.35 U1.36 U1.37 U1.39 U1.40 U1.41 U1.42 U2.5 U3.4 U3.6 U3.7 U3.10 U3.11 U3.13 U4.3 U5.3 U5.6 U5.7 U5.8

## Polygon pours and split planes (outlines as drawn)
+5V on MidLayer1 (hatched 90Degree grid 0.1 track 0.3, remove dead copper): -0.85,45.8 -0.85,4.65 50.5,4.65 50.5,45.75 -0.775,45.75
GND on MidLayer2 (hatched 90Degree grid 0.1 track 0.3, remove dead copper): -1.125,45.775 50.575,45.775 50.575,4.5 -0.5,4.5 -0.5,45.8 -0.575,45.8
Net3_1 on MidLayer2 (hatched 90Degree grid 0.1 track 0.3, remove dead copper): 5.875,65.55 5.875,49.725 38.55,49.725 38.55,65.025 5.85,65.025 5.85,64.75

## Keep-outs
Keep-Out Layer:
  lines w0.3: 0,5 0,65 50,65 50,5 0,5

## Silkscreen, mask and mechanical layers (free items; w line width, h text height)
Mechanical 1:
  circle w0.254: c16.066,17.3 r4.584
  circle w0.254: c22.23,60.425 r4.095
  text "GND" at 2.375,-2.275 h0.8 r90
  text "GND" at 48.525,-2.35 h0.8 r90
  text "pwm1" at 40.7,-2.825 h0.8 r90
  text "canl" at 45.55,-2.825 h0.8 r90
  text "led1" at 18.175,-2.875 h0.8 r90
  text "adr1" at 10.4,-2.975 h0.8 r90
  text "led0" at 15.625,-3.15 h0.8 r90
  text "adr2" at 12.925,-3.25 h0.8 r90
  text "adr0" at 7.975,-3.3 h0.8 r90
  text "pwm0" at 38.175,-3.35 h0.8 r90
  text "canh" at 43.3,-3.35 h0.8 r90
  text "+12v" at 5.225,-3.575 h0.8 r90
  text "anin1" at 33.15,-4 h0.8 r90
  text "anin4" at 25.725,-4.45 h0.8 r90
  text "anin5" at 23.225,-4.5 h0.8 r90
  text "anin3" at 28.3,-4.5 h0.8 r90
  text "anin0" at 35.75,-4.5 h0.8 r90
  text "anin2" at 30.625,-4.55 h0.8 r90
Mechanical 3:
  text "3000.14_STM8" at 33.075,32.975 h1.4
  text "18MKM" at 37.125,30.975 h1.4
  text "FAT42V8" at 36.125,28.95 h1.4
  text "1" at 1.925,9.25 h1.4

## Dimensions
0,5 to 0,65 on Mechanical 1
0,65 to 50,65 on Mechanical 1
26.3,63.25 to 2.1,7.1 on Mechanical 1